# Altium PCB CH-HC-V2.3(change).PcbDoc
Units mil, origin at the board's own origin, x right, y up, seen from the top; angles counter-clockwise.
Board outline 12846.15 x 9153.85 mil, 2 copper layers (TopLayer, BottomLayer); 54 components, 528 nets, 213 pads, 1 vias.
Unrouted connection lines stored in the file: 1.
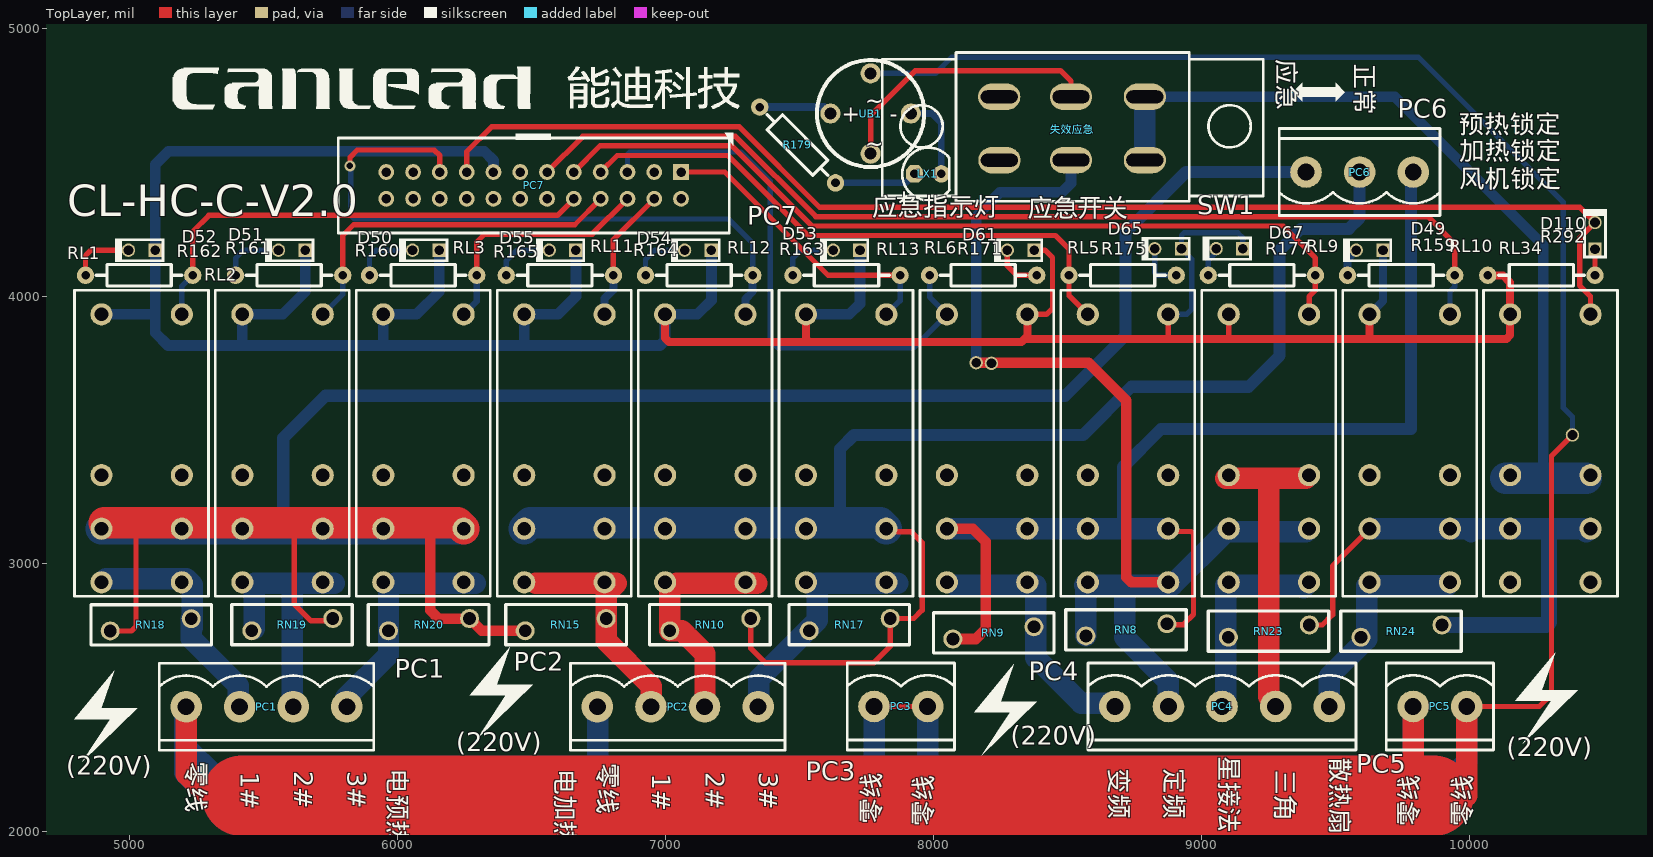
[diagram p0: TopLayer view]
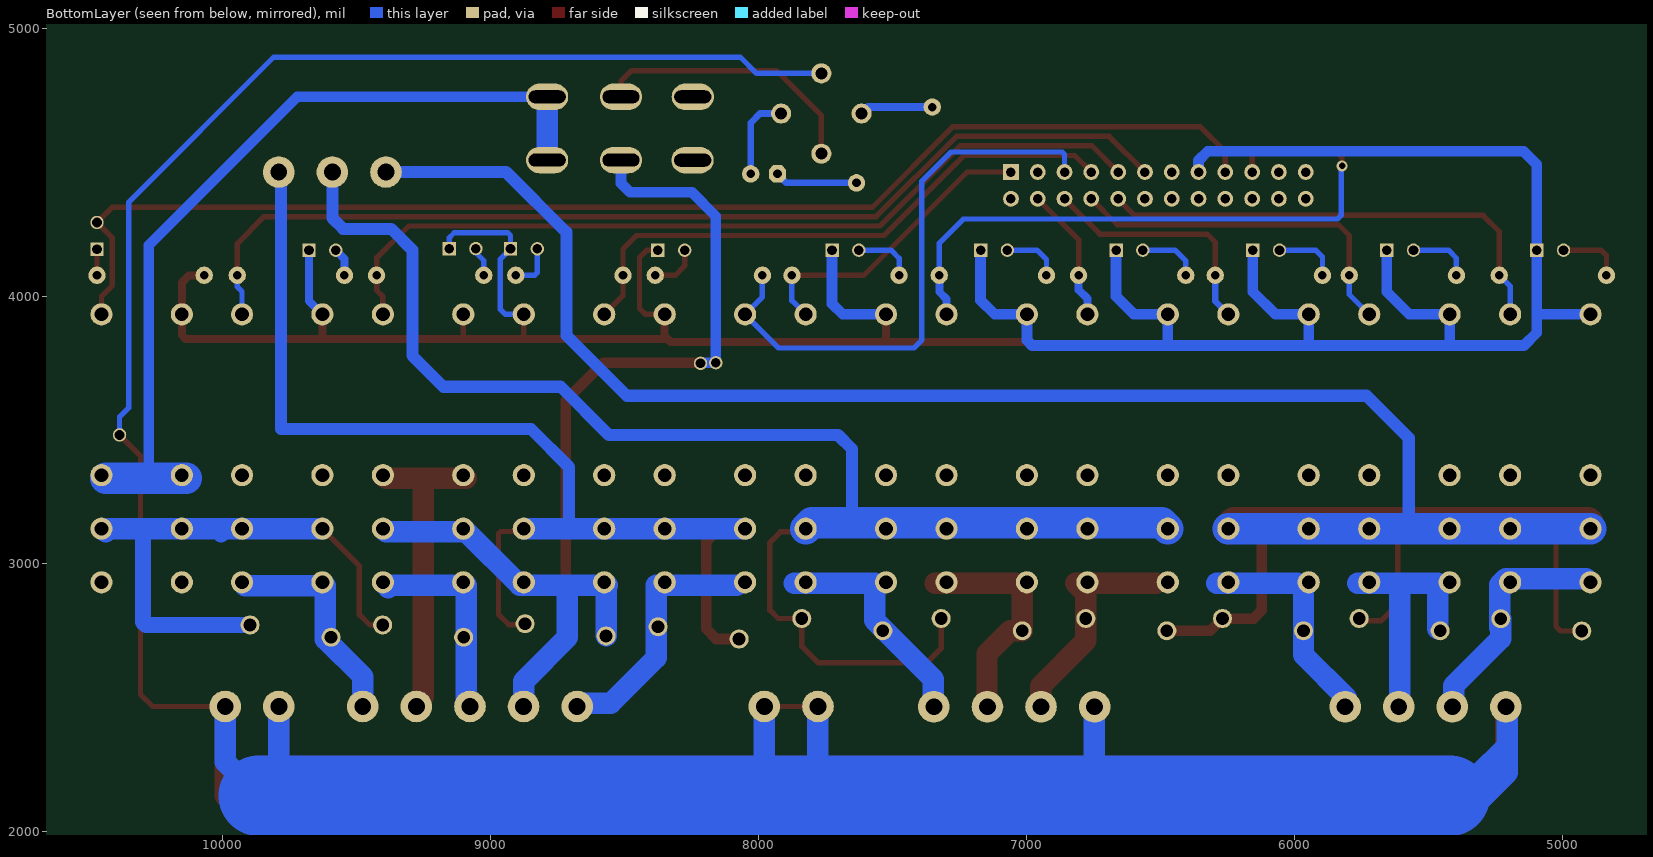
[diagram p1: BottomLayer view, seen from below]

## Layer stack, top to bottom
TopSolder: solder mask 0.4, Solder Resist, Dk 3.5
TopLayer: signal copper 1.4
Dielectric1: dielectric 12.6, FR-4, Dk 4.8
BottomLayer: signal copper 1.4
BottomSolder: solder mask 0.4, Solder Resist, Dk 3.5

## Board outline
12597.31,8763.6 -210.38,8763.6 -210.38,-390.24 12635.77,-390.24 12635.77,8340.52

## Design rules (kind name [scope] priority, off if disabled: settings)
Clearance Clearance_1 [All] p1 off: gap=30
Clearance [All] p2: gap=15
ComponentClearance [All] p1 off: gap=10 collisioncheckmode=3 verticalgap=10 showdistances=FALSE
FabricationTestPointUsage TestPointUsage [All] p1: valid=0 allowmultiple=FALSE
FabricationTestpoint Testpoint [All] p1: side=3 testpointundercomponent=TRUE minsize=40 maxsize=100 preferedsize=60 minholesize=20 maxholesize=40 preferedholesize=32 testpointgrid=1 allowsidetop=TRUE allowsidebottom=TRUE usegrid=TRUE gridtolerance=0.01
PolygonConnect PolygonConnect_1 [All vs (InPadClass('All Pads'))] p1: connectstyle=NoConnect reliefconductorwidth=10 reliefentries=4 polygonreliefangle="90 Angle" airgapwidth=10
PolygonConnect [All] p2: connectstyle=Direct reliefconductorwidth=10 reliefentries=4 polygonreliefangle="90 Angle" airgapwidth=10
RoutingVias [All] p1: holewidth=24 width=40 viastyle="Through Hole" minholewidth=24 minwidth=40 maxholewidth=24 maxwidth=40
SilkToSolderMaskClearance SilkscreenOverComponentPads [IsPad] p1: minsilkscreentomaskgap=10 clearancetoexposedcopper=TRUE
SolderMaskExpansion [All] p1: expansion=4
Width [All] p1: maxlimit=300 minlimit=10 preferedwidth=30
25 further rules are at their usual default settings.

## Classes and differential pairs
component class Lights: D74 Q11 R118 R194 RN22 Y1 Y2
component class MCU单片机: 1 24V C1 C2 C3 C4 C5 C6 C7 C8 C19 C20 C29 C30 C31 C32 C34 C35 CU1 D1 D2 D3 F F2 P P1 R1 R2 R3 R4 R5 R6 R7 R8 R9 R11 R12 R13 R35 R79 U1 VR1 ѹ? 冷/自/热 定频/变频 客户接线自动门1 情报面 星/三角 电柜内部1 电柜内部2 电柜风扇

## Components (designator, comment, footprint, x,y, rotation, side; value= is the part's Value field where it differs from the comment)
D49 "GREEN" RT_LED1 9626.56,4171.18 r0 top locked
D50 "GREEN" RT_LED1 6104.36,4171.18 r0 top locked
D51 "" RT_LED1 5604.36,4171.18 r0 top locked
D52 "GREEN" RT_LED1 5044.36,4171.18 r0 top locked
D53 "GREEN" RT_LED1 7674.36,4171.18 r0 top locked
D54 "GREEN" RT_LED1 7120,4171.18 r0 top locked
D55 "GREEN" RT_LED1 6614.36,4171.18 r0 top locked
D61 "GREEN" RT_LED1 8324.36,4171.18 r0 top locked
D65 "GREEN" RT_LED1 8874.36,4176.18 r0 top locked
D67 "GREEN" RT_LED1 9103.63,4177.1 r0 top locked
D110 "GREEN" RT_LED1 10467.74,4224.64 r270 top
LX1 "" LEDA 7928.02,4456.05 r180 top locked (schematic designator 红?)
PC1 "Header 4" PL4X 5509.49,2467.11 r0 top locked (schematic designator 再热)
PC2 "Header 4" PL4X 7044.49,2467.11 r0 top locked (schematic designator 预热)
PC3 "硬接线" PL2X 7877.01,2468.18 r180 top locked (schematic designator P24)
PC4 "硬接线" PL5X 9075.82,2468.18 r180 top locked (schematic designator 送风机)
PC5 "硬接线" PL2X 9889.21,2468.18 r180 top locked (schematic designator P24)
PC6 "Header 3" PL3X 9389.24,4462.77 r0 top locked (schematic designator 火线)
PC7 "Con2*12-1mm" FC24LX 6506.71,4412.77 r180 top (schematic designator P21)
R159 "15K" AXIAL0.4 9544.75,4077.86 r0 top locked
R160 "15K" AXIAL0.4 5894.75,4077.86 r0 top locked
R161 "15K" AXIAL0.4 5394.75,4077.86 r0 top locked
R162 "15K" AXIAL0.4 4834.75,4077.86 r0 top locked
R163 "15K" AXIAL0.4 7474.75,4077.86 r0 top locked
R164 "15K" AXIAL0.4 6924.75,4077.86 r0 top locked
R165 "15K" AXIAL0.4 6404.75,4077.86 r0 top locked
R171 "15K" AXIAL0.4 8383.84,4077.13 r180 top locked
R175 "15K" AXIAL0.4 8904.19,4077.13 r180 top locked
R177 "15K" AXIAL0.4 9024.89,4077.86 r0 top locked
R179 "51K 2512 1W" AXIAL0.4 7632.69,4422.49 r135 top locked
R292 "15K" AXIAL0.4 10068.27,4077.86 r0 top locked
RL1 "三级预热" HF115-5#1 5043.69,3431.62 r0 top locked
RL2 "二级预热" HF115-5#1 5569.57,3431.62 r0 top locked
RL3 "一级预热" HF115-5#1 6095.44,3431.62 r0 top locked
RL5 "送风机定频起停" HF115-5#1 8724.81,3431.62 r0 top locked
RL6 "送风机变频起停" HF115-5#1 8198.94,3431.62 r0 top locked
RL9 "星三角切换" HF115-5#1 9250.69,3431.62 r0 top locked
RL10 "电柜散热风扇" HF115-5#1 9776.56,3431.62 r0 top locked
RL11 "三级再热" HF115-5#1 6621.32,3431.62 r0 top locked
RL12 "二级再热" HF115-5#1 7147.19,3431.62 r0 top locked
RL13 "一级再热" HF115-5#1 7673.06,3431.62 r0 top locked
RL34 "星三角切换" HF115-5#2 10301.06,3431.62 r180 top locked
RN8 "1D471" RAD0.3 8718.99,2754.25 r0 top locked
RN9 "1D471" RAD0.3 8222.62,2742.77 r180 top locked
RN10 "1D471" RAD0.3 7166.06,2773.57 r0 top locked
RN15 "1D471" RAD0.3 6626.06,2773.57 r180 top locked
RN17 "1D471" RAD0.3 7686.06,2773.57 r0 top locked
RN18 "1D471" RAD0.3 5077.5,2772.92 r180 top locked
RN19 "1D471" RAD0.3 5606.06,2773.57 r0 top locked
RN20 "1D471" RAD0.3 6116.06,2773.57 r0 top locked
RN23 "1D471" RAD0.3 9250.75,2749.49 r0 top locked
RN24 "1D471" RAD0.3 9745.38,2749.49 r0 top locked
UB1 "DB107S" BRI-W04 7764.36,4681.18 r0 top locked (schematic designator U1X)
失效应急 "Header 6" SW220V 8515.92,4625.27 r0 top locked

## Footprints (in the part's own frame and the unit in brackets; to place one, negate y for a bottom-side part, rotate by r counter-clockwise, add the part's x,y. Pads: shape width x height; smd on the part's side, far side on the other; paste and mask are expansions set on the pad)
AXIAL0.4 [mil]
  round 65 hole 32: 1(-0.53,-0.37) 2(399.47,-0.37)
  silkscreen extent 39,-40 359,40, body extent -12,-45 412,46, height 116
BRI-W04 [mil]
  round 75 hole 45: 1(0,150) 2(0,-150) 3(-150,0) 4(150,0)
  silkscreen extent -200,-200 200,200
FC24LX [mm]
  rect 1.5x1.5 hole 0.9: 1(-13.97,-1.27)
  round 1.5 hole 0.9: 2(-13.97,1.27) 3(-11.43,-1.27) 4(-11.43,1.27) 5(-8.89,-1.27) 6(-8.89,1.27) 7(-6.35,-1.27) 8(-6.35,1.27) 9(-3.81,-1.27) 10(-3.81,1.27) 11(-1.27,-1.27) 12(-1.27,1.27) 13(1.27,-1.27) 14(1.27,1.27) 15(3.81,-1.27) 16(3.81,1.27) 17(6.35,-1.27) 18(6.35,1.27) 19(8.89,-1.27) 20(8.89,1.27) 21(11.43,-1.27) 22(11.43,1.27) 23(13.97,-1.27) 24(13.97,1.27)
  silkscreen extent -18.9,-5.01 18.54,4.5
HF115-5#1 [mm]
  round 2.1 hole 1.3: 1(-3.81,12.7) 2(3.81,12.7) 3(-3.81,-12.7) 3(3.81,-12.7) 4(-3.81,-7.62) 4(3.81,-7.62) 5(-3.81,-2.54) 5(3.81,-2.54)
  silkscreen extent -6.37,-14.01 6.33,14.99
HF115-5#2 [mm]
  round 2.1 hole 1.3: 1(-3.81,-12.7) 2(3.81,-12.7) 3(-3.81,12.7) 3(3.81,12.7) 4(-3.81,7.62) 4(3.81,7.62) 5(-3.81,2.54) 5(3.81,2.54)
  silkscreen extent -6.37,-14.99 6.33,14.01
LEDA [mil]
  oct 65x65 hole 32: A(0,0)
  round 65 hole 32: K(-100,0)
  silkscreen extent -131,-98 46,99
PL2X [mm]
  round 3 hole 1.6: 1(-2.54,0) 2(2.54,0)
  silkscreen extent -5.08,-4.13 5.08,4.13
PL3X [mm]
  round 3 hole 1.6: 1(0,0) 2(5.08,0) 3(10.16,0)
  silkscreen extent -2.54,-4.13 12.7,4.13
PL4X [mm]
  round 3 hole 1.6: 1(-7.62,0) 2(-2.54,0) 3(2.54,0) 4(7.62,0)
  silkscreen extent -10.16,-4.13 10.16,4.13
PL5X [mm]
  round 3 hole 1.6: 1(-10.16,0) 2(-5.08,0) 3(0,0) 4(5.08,0) 5(10.16,0)
  silkscreen extent -12.7,-4.13 12.7,4.13
RAD0.3 [mm]
  round 1.8 hole 1.2: 1(3.84,0.58) 2(-3.84,-0.58)
  silkscreen extent -5.76,-1.91 5.67,1.91
RT_LED1 [mil]
  rect 50x50 hole 36: A(50,0)
  round 50 hole 36: K(-50,0)
  silkscreen extent -100,-44 84,44, body extent -84,-44 84,44, height 236
SW220V [mm]
  oval 4x2.5 hole 1.2 slot 3.5 at 0 deg: 1(-6.885,-3.005) 2(-0.095,-2.995) 3(6.905,-2.995) 4(-6.905,3.005) 5(-0.095,3.005) 6(6.905,3.005)
  silkscreen extent -17.99,-6.9 18.13,7.21

## Part data
D49 D50 D51 D52 D53 D54 D55 D61 D65 D67 D110: library part LED, "Zener Diode"
PC3 PC5: library part "Header 2", "Header, 2-Pin"
R159 R160 R161 R162 R163 R164 R165 R171 R175 R177 R179 R292: library part RES2
RL1 RL2 RL3 RL5 RL6 RL10 RL11 RL12 RL13: library part RELAY
RL34: library part HF3FF
RN8 RN9 RN10 RN15 RN17 RN18 RN19 RN20 RN23 RN24: library part RN
UB1: library part Bridge
失效应急: "Header, 6-Pin"

## Free pads (board coordinates)
  round 50 hole 36: 0(8157.99,3750.99) 1(8215.15,3748.63) 2(10383.56,3481.6)

## Via types
v1: diameter 40, hole 24, TopLayer to BottomLayer, tented both sides, 1 vias

## Nets (pads, with @x,y where several pads share a name; then routed paths per layer and width w, separated by ;. In a path a pad name is that pad's centre, name@x,y a point inside that pad or via, vN(x,y) a via of type N, cw(c..) or ccw(c..) an arc to the next point about the centre after c; other vN are vias at no path point)
1C2: PC4.5 RL6.3 RN9.2 | length 936.1
  BottomLayer w80: RL6.3@8079.83,2920.34 8379.83,2920.34 8379.83,2650.68 8551.02,2479.49 PC4.5@8675.38,2479.49
1C3: pad.0 pad.1 PC4.4 RL5.3 RL9.4 RN8.2 失效应急.2 | length 4165.1
  TopLayer w40: pad.0 8577.72,3750.98 8718.68,3610.02 8718.68,2950.65 8737.71,2931.62 RL5.3@8874.81,2931.62
  BottomLayer w39.37: pad.1 8212.79,3750.99 pad.0 8157.98,4298.12 8247.21,4387.35 8478.35,4387.35 8512.18,4421.18 失效应急.2
  BottomLayer w80: RL5.3@8563.52,2920.44 RL5.3@8565.38,2918.58 ; RN8.2 8567.81,2916.15 RL5.3@8565.38,2918.58 ; PC4.4@8875.38,2479.49 8875.38,2562.72 8712.28,2725.81 8712.28,2910.82 8721.9,2920.44 ; RL9.4@9099.99,3131.2 RL9.4@9089.24,3120.44 ; RL9.4@9389.24,3120.44 RL9.4@9089.24,3120.44 ; RL5.3@8565.38,2918.58 8567.24,2920.44 8721.9,2920.44 ; 8721.9,2920.44 8889.24,2920.44 RL9.4@9089.24,3120.44
1C6: 
1C7: PC1.4 RL3.3 RN20.2 | length 803.9
  BottomLayer w80: PC1.4@5804.87,2500.43 5964.88,2660.44 RN20.2 5964.88,2904.2 5988.85,2928.17 6288.85,2928.17
1C8: PC1.3 RL2.3 RN19.2 | length 896.8
  BottomLayer w80: RN19.2@5463.22,2759.08 5463.22,2928.17 5604.87,2928.17 ; PC1.3@5604.87,2500.43 5604.87,2928.17 ; 5763.22,2928.17 5604.87,2928.17
1C9: PC1.2 RL1.3 RN18.2 | length 865.7
  BottomLayer w80: RL1.3@4910.57,2944.96 5210.57,2944.96 5232.61,2922.91 5232.61,2790.56 5232.61,2762.29 5228.68,2758.36 ; RN18.2 5228.68,2758.36 ; PC1.2@5404.87,2500.43 5404.87,2545.43 5228.68,2721.63 5228.68,2758.36
1C10: PC2.4 RL13.3 RN17.2 | length 845.6
  BottomLayer w80: PC2.4@7346.06,2473.57 7346.06,2569.97 7565.75,2789.66 7565.75,2928.17 7865.75,2928.17
1C11: PC2.3 RL12.3 RN10.2 | length 850.6
  TopLayer w80: PC2.3@7146.06,2468.88 7146.06,2664.85 7060.17,2750.74 RN10.2 7014.88,2902.93 7040.11,2928.17 7340.11,2928.17
1C12: PC2.2 RL11.3 RN15.2 | length 844.6
  TopLayer w80: 6514.48,2928.17 6673.41,2928.17 6814.48,2928.17 6777.24,2890.93 RN15.2 6777.24,2713.06 6946.06,2544.24 PC2.2@6946.06,2468.88
1C17: PC4.1 RL10.3 RN24.2 | length 798
  BottomLayer w80: PC4.1@9475.38,2479.49 9475.38,2579.79 9615.38,2719.79 9615.38,2919.49 RL10.3@9915.38,2919.49
1C22: 
1C27: 
1C31: 
1C32: 
1C33: 
1C34: 
1C35: 
1C36: 
1C37: 
2-38: 
2-39: 
2-40: 
2-41: 
3-24: 
3-25: 
3-26: 
3-27: 
3-28: 
3-69: 
3-70: 
3-71: 
3-72: 
10V-面板-温度输入: 
10V-面板-湿度输入: 
24V: D49.A D50.A D51.A D52.A D53.A D54.A D55.A D61.A D65.A D67.A PC7.15 R292.1 RL1.1 RL2.1 RL3.1 RL5.2 RL6.2 RL9.1 RL10.1 RL11.1 RL12.1 RL13.1 RL34.2 | length 11899.9
  TopLayer w20: RL6.2 8420.84,3931.62 8443.03,3953.81 8443.03,4143.29 8415.14,4171.18 D61.A ; 8872.17,3839.86 8874.81,3842.51 RL5.2 ; RL9.1 9100.69,3841.57 9102.4,3839.86
  TopLayer w30: RL12.1 6997.19,3843.62 7012.3,3828.51 7535.41,3828.51 ; RL13.1 7523.06,3840.86 7535.41,3828.51 ; RL6.2 8348.94,3850.32 8338.48,3839.86 ; RL10.1 9626.56,3841.69 9624.73,3839.86 ; R292.1 10124.38,4077.49 10151.06,4050.81 RL34.2 10151.06,3853.66 10137.27,3839.86 9624.73,3839.86 ; 7535.41,3828.51 8327.13,3828.51 8338.48,3839.86 ; 8338.48,3839.86 8872.17,3839.86 9102.4,3839.86 9624.73,3839.86
  BottomLayer w20: RL5.2 8943.96,3931.62 8963.4,3951.06 8963.4,4137.15 D65.A 8924.36,4226.18 8934.36,4236.18 9134.36,4236.18 9153.63,4216.91 D67.A
  BottomLayer w30: RL10.1 9676.56,3981.62 D49.A
  BottomLayer w40: RL1.1 5093.92,3931.62 5094.36,3931.18 ; D51.A 5654.36,4016.18 5569.8,3931.62 RL2.1 5419.57,3819.68 5415.44,3815.55 ; D50.A 6154.36,4016.18 6069.8,3931.62 RL3.1 5945.44,3816.09 5944.91,3815.55 ; PC7.15 6356.71,4506.07 6322.25,4540.53 5143.71,4540.53 5094.36,4491.18 D52.A 5094.36,3931.18 ; D55.A 6664.36,3998.84 6597.15,3931.62 RL11.1 6471.32,3821.32 6477.08,3815.55 ; D54.A 7170,3984.48 7117.15,3931.62 RL12.1 6997.19,3834.64 6978.1,3815.55 6477.08,3815.55 ; RL13.1 7684.8,3931.62 7724.36,3971.18 D53.A ; 5094.36,3931.18 5094.36,3863.11 5141.92,3815.55 5415.44,3815.55 ; 5415.44,3815.55 5944.91,3815.55 ; 5944.91,3815.55 6477.08,3815.55
24V+: 
24V-情报-负压: 
24V-情报-远值: 
24V-情报-远启: 
24V-面板-值机: 
24V-面板-故障: 
24V-面板-滤网: 
24V-面板-运行: 
24VIN: 
24VIN2: 
164CLK: 
164SDA: 
165S_DO1: 
165S_DO2: 
165S_DO3: 
165S_DO4: 
220V_N: pad.2 PC1.1 PC2.1 PC3.1 PC3.2 PC5.1 PC5.2 UB1.1 | length 17295.6
  TopLayer w20: PC3.2 PC3.1 ; PC5.1 10259.74,2468.18 10305.24,2513.68 10305.24,3403.28 pad.2
  TopLayer w80: PC1.1 5209.49,2215.82 5289.54,2135.77 5418.84,2135.77 ; 9789.21,2146.65 PC5.2 ; 9989.21,2135.43 PC5.1
  TopLayer w300: 5418.84,2135.77 5419.17,2135.43 9863.73,2135.43
  BottomLayer w20: UB1.1 8006.55,4831.18 8066.54,4891.17 9808.83,4891.17 10349.1,4350.9 10349.1,3583.4 10383.55,3548.94 pad.2
  BottomLayer w80: PC1.1@5204.87,2460.43 5204.87,2320.43 ; 5329.81,2095.49 5204.87,2220.43 5204.87,2320.43 ; 5379.87,2205.43 5319.87,2205.43 5204.87,2320.43 ; 6746.06,2237.23 PC2.1@6746.06,2459.49 ; 7777.01,2245.38 PC3.2 ; 7977.01,2257.98 PC3.1 ; 9789.21,2141.73 PC5.2 ; 9863.73,2135.43 9989.21,2260.91 PC5.1
  BottomLayer w300: 5419.17,2135.43 9863.73,2135.43
485-A: 
485-B: 
485_GND_1: 
485_GND_2: 
485_GND_3: 
485_VCC_1: 
485_VCC_2: 
485_VCC_3: 
+10V: 
+15V: 
<-变频故障: 
<-变频运行: 
<-工频故障: 
<-工频运行: 
<-急停按钮: 
<-本地值机: 
<-本地运行: 
<-远值使能: 
<-远起使能: 
AC24GATE1: 
AC24GATE2: 
AC24V1: 
AC24V2: 
AD1: 
AD2: 
AD3: 
AD4: 
AD5: 
AD6: 
CLK_165: 
C变频: 
C情报输出: 
DA_ADD1: 
DA_ADD2: 
DA_WR1: 
DA_WR2: 
DB0: 
DB1: 
DB2: 
DB3: 
DB4: 
DB5: 
DB6: 
DB7: 
DE/RE: 
DE/RE2: 
DI1: 
DI2: 
DI3: 
DI4: 
DI5: 
DI6: 
DI7: 
DI8: 
DI9: 
DI10: 
DI11: 
DI12: 
DI13: 
DI14: 
DI15: 
DI15A: 
DI16: 
DI17: 
DI18: 
DI19: 
DI20: 
DI21: 
DI22: 
DI23: 
DI24: 
DI25: 
DI26: 
DI27: 
DI28: 
DI29: 
DI30: 
DI31: 
DI32: 
DI33: 
DI34: 
DI35: 
DI36: 
DI37: 
DI38: 
DI39: 
DI40: 
EX_A1: 
EX_B1: 
GND: D110.K PC7.17 RL34.1 | length 4856.6
  TopLayer w20: PC7.17 6256.71,4538.53 6349.36,4631.18 7274.36,4631.18 7574.36,4331.18 10411.19,4331.18 D110.K 10410.25,4217.15 10410.25,4039.53 10451.06,3998.72 RL34.1
IN2-A+: 
IN2-B-: 
IN-A+: 
IN-B-: 
L: 
LAMP1: 
LAMP2: 
LAMP3: 
LAMP4: 
LAMP5: 
LAMP6: 
LAMP7: 
LAMP8: 
LAMP9: 
LAMP10: 
LAMP11: 
LAMP12: 
LAMP13: 
LAMP14: 
LOUT1: 
LOUT2: 
LOUT3: 
LOUT4: 
LOUT5: 
LOUT6: 
LOUT7: 
LOUT8: 
LOUT9: 
LOUT10: 
LOUT11: 
LOUT12: 
LOUT13: 
LOUT14: 
L加热: PC6.2 RL11.4 RL12.4 RL13.4 RN10.1 RN17.1 | length 5618.9
  TopLayer w20: RN10.1 7317.24,2684.96 7370.31,2631.89 7776.8,2631.89 7837.24,2692.33 RN17.1 7925.25,2796.41 7956.74,2827.9 7956.74,3080.42 7917.21,3119.95 7866.06,3119.95
  BottomLayer w45: 7650.52,3154.53 7650.52,3429.9 7702.22,3481.59 8557.36,3481.59 8737.19,3661.42 9175,3661.42 9291,3777.42 9291,4172 9370,4251 9549,4251 9589.24,4291.24 PC6.2
  BottomLayer w118.11: RL11.4@6471.32,3131.62 6494.22,3154.53 7650.52,3154.53 7800.16,3154.53 RL13.4@7823.06,3131.62
L变频: PC6.3 RL5.4 RL6.4 RL10.4 RL34.4 RN8.1 RN9.1 RN23.1 RN24.1 | length 6318.4
  TopLayer w20: RL5.4@8869.8,3121.39 8960.77,3121.39 8969.12,3113.05 8969.12,2811.92 8930.46,2773.27 RN8.1@8882.49,2773.27 ; RN23.1 9449.9,2772.32 9488.55,2810.97 9488.55,2992.66 RL10.4@9615.38,3119.49
  TopLayer w39.37: RL6.4@8048.94,3131.62 8146.16,3131.62 8194.13,3083.66 8194.13,2757.87 8156.19,2719.93 RN9.1
  BottomLayer w45: 8706.45,3131.62 8706.45,3361.73 8847.67,3502.95 9780.74,3502.95 9780.74,4454.27 PC6.3
  BottomLayer w60: RN24.1 10285.19,2772.32 10296.27,2783.4 10296.27,3119.49 ; 9995.3,3119.49 10004.87,3109.91
  BottomLayer w80: RL6.4@8048.94,3131.62 8348.94,3131.62 8574.81,3131.62 8706.45,3131.62 RL5.4@8874.81,3131.62 ; RL10.4@9626.56,3131.62 9926.56,3131.62 10151.06,3131.62 10423.68,3131.62 RL34.4@10434.87,3120.43
L预热: PC6.1 RL1.4 RL2.4 RL3.4 RN15.1 RN18.1 RN19.1 RN20.1 | length 9341.4
  TopLayer w20: RL1.4@4922.97,3138.64 5013.94,3138.64 5022.28,3130.3 5022.28,2767.29 5005.07,2750.09 RN18.1 ; RL2.4@5750.82,3121.85 5612.83,3121.85 5612.83,2851.06 5676.34,2787.54 RN19.1@5756.57,2787.54
  TopLayer w39.37: 6120.28,3154.53 6120.28,2826.95 6150.82,2796.41 RN20.1 6312.91,2750.74 RN15.1
  TopLayer w118.11: RL1.4@4903.77,3154.53 6120.28,3154.53 6222.54,3154.53 RL3.4@6245.44,3131.62
  BottomLayer w45: 5572.08,3147.64 5572.08,3470.47 5729.56,3627.95 8490.39,3627.95 8714.8,3852.36 8714.8,4238.25 8716.52,4238.25 8941.04,4462.77 PC6.1
  BottomLayer w118.11: RL1.4@4893.69,3131.62 5193.69,3131.62 5419.57,3131.62 5719.57,3131.62 5945.44,3131.62 RL3.4@6245.44,3131.62
NetC1_1: 
NetC14_1: 
NetC43_2: 
NetC44_2: 
NetD1_A: 
NetD6_A: 
NetD7_A: 
NetD8_A: 
NetD9_A: 
NetD10_A: 
NetD11_A: 
NetD12_A: 
NetD13_A: 
NetD14_A: 
NetD15_A: 
NetD15_K: 
NetD16_A: 
NetD16_K: 
NetD17_A: 
NetD17_K: 
NetD18_A: 
NetD18_K: 
NetD19_A: 
NetD20_A: 
NetD21_A: 
NetD22_A: 
NetD23_A: 
NetD24_A: 
NetD25_A: 
NetD26_A: 
NetD27_A: 
NetD28_A: 
NetD29_A: 
NetD30_A: 
NetD31_A: 
NetD32_A: 
NetD33_A: 
NetD34_A: 
NetD35_K: 
NetD36_K: 
NetD37_K: 
NetD38_K: 
NetD39_K: 
NetD40_K: 
NetD41_K: 
NetD42_K: 
NetD43_K: 
NetD44_K: 
NetD45_K: 
NetD46_K: 
NetD47_K: 
NetD48_K: 
NetD49_K: D49.K R159.1 | length 107.1
  BottomLayer w30: R159.1 9544.22,4138.84 D49.K
NetD50_K: D50.K R160.1 | length 239.1
  BottomLayer w20: R160.1 5894.22,4146.04 5919.36,4171.18 D50.K
NetD51_K: D51.K R161.1 | length 236.2
  BottomLayer w20: R161.1 5394.22,4141.04 5424.36,4171.18 D51.K
NetD52_K: D52.K R162.1 | length 242
  TopLayer w20: R162.1 4834.22,4151.04 4854.36,4171.18 D52.K
NetD53_K: D53.K R163.1 | length 226.2
  BottomLayer w20: R163.1 7474.22,4141.04 7504.36,4171.18 D53.K
NetD54_K: D54.K R164.1 | length 218.9
  BottomLayer w20: R164.1 6924.22,4136.04 6959.36,4171.18 D54.K
NetD55_K: D55.K R165.1 | length 230.3
  BottomLayer w20: R165.1 6404.22,4131.04 6444.36,4171.18 D55.K
NetD56_K: 
NetD57_K: 
NetD58_K: 
NetD59_K: 
NetD60_K: 
NetD61_K: D61.K R171.1 | length 183.5
  TopLayer w20: D61.K 8274.36,4111.98 8308.85,4077.49 R171.1
NetD62_K: 
NetD63_K: 
NetD64_K: 
NetD65_K: D65.K R175.1 | length 173
  BottomLayer w20: D65.K 8824.36,4087.82 8834.68,4077.49 R175.1
NetD66_K: 
NetD67_K: D67.K R177.1 | length 111.7
  BottomLayer w20: R177.1 9024.36,4132.22 9053.63,4161.49 D67.K
NetD71_A: 
NetD72_K: 
NetD73_K: 
NetD74_A: 
NetD74_K: 
NetD75_A: 
NetD75_K: 
NetD76_K: 
NetD77_K: 
NetD78_K: 
NetD79_K: 
NetD80_K: 
NetD81_K: 
NetD82_K: 
NetD83_K: 
NetD84_K: 
NetD85_K: 
NetD86_K: 
NetD87_K: 
NetD88_K: 
NetD89_K: 
NetD90_K: 
NetD91_K: 
NetD92_K: 
NetD93_K: 
NetD94_K: 
NetD95_A: 
NetD96_A: 
NetD97_A: 
NetD98_A: 
NetD99_A: 
NetD100_A: 
NetD101_A: 
NetD102_A: 
NetD103_A: 
NetD104_A: 
NetD105_A: 
NetD106_A: 
NetD106_K: 
NetD107_A: 
NetD107_K: 
NetD108_A: 
NetD108_K: 
NetD109_A: 
NetD110_A: D110.A R292.2 | length 97.1
  TopLayer w20: R292.2 D110.A
NetD199_A: 
NetDZ1_K: 
NetF1_1: 
NetF2_1: 
NetF3_1: 
NetF4_1: 
NetF5_1: 
NetF6_1: 
NetF9_2: 
NetQ1_1: 
NetQ1_2: 
NetQ2_2: 
NetQ3_2: 
NetQ4_1: 
NetQ4_2: 
NetQ5_1: 
NetQ5_2: 
NetQ6_2: 
NetQ7_1: 
NetQ7_2: 
NetQ8_2: 
NetQ9_1: 
NetQ9_2: 
NetQ10_2: 
NetQ11_2: 
NetQ12_2: 
NetQ13_1: 
NetQ13_2: 
NetQ13_3: 
NetQ14_1: 
NetQ15_2: 
NetQ15_3: 
NetQ16_2: 
NetQ17_2: 
NetQ18_1: 
NetQ18_2: 
NetQ18_3: 
NetQ19_1: 
NetQ19_2: 
NetQ20_2: 
NetQ21_2: 
NetQ22_2: 
NetQ23_2: 
NetQ24_2: 
NetQ25_2: 
NetR15_2: 
NetR16_2: 
NetR17_2: 
NetR18_2: 
NetR19_2: 
NetR20_2: 
NetR21_2: 
NetR22_2: 
NetR23_2: 
NetR24_2: 
NetR25_2: 
NetR26_2: 
NetR27_2: 
NetR28_2: 
NetR29_2: 
NetR30_2: 
NetR31_2: 
NetR32_2: 
NetR33_2: 
NetR34_2: 
NetR36_1: 
NetR68_2: 
NetR69_2: 
NetR70_2: 
NetR71_2: 
NetR88_1: 
NetR89_1: 
NetR91_2: 
NetR92_1: 
NetR93_2: 
NetR94_2: 
NetR95_2: 
NetR96_2: 
NetR97_2: 
NetR98_2: 
NetR178_2: 
NetR179_1: LX1.A R179.1 | length 308.6
  BottomLayer w25: R179.1 7894.34,4422.38 LX1.A
NetR179_2: R179.2 UB1.3 | length 273.8
  BottomLayer w30: R179.2 7590.32,4705.22 UB1.3
NetR192_1: 
NetR196_2: 
NetR197_1: 
NetR199_1: 
NetR200_2: 
NetR201_2: 
NetR204_1: 
NetR209_1: 
NetR211_2: 
NetR212_1: 
NetR213_2: 
NetR293_1: 
NetR294_1: 
NetRL34_5: RL34.5 失效应急.3 失效应急.6 | length 3061.8
  BottomLayer w39.37: 失效应急.6 9720.93,4743.57 10274.36,4190.14 10274.36,3380.43
  BottomLayer w80: 失效应急.3 失效应急.6
  BottomLayer w118.11: RL34.5@10134.87,3320.43 RL34.5@10434.87,3320.43
NetU1X_2: UB1.2 失效应急.5 | length 1034.6
  TopLayer w20: UB1.2 7764.36,4674.26 7931.29,4841.18 8472.82,4841.18 8512.18,4801.82 失效应急.5
NetU1X_4: LX1.K UB1.4 | length 318.5
  BottomLayer w25: UB1.4 7993.33,4681.18 8028.02,4646.49 LX1.K
NetU42_2: 
NetU55_2: 
OSC1: 
OSC2: 
OSC3: 
OSC4: 
OUT1: 
OUT2: 
OUT3: 
OUT4: 
OUT5: 
OUT6: 
OUT7: 
OUT8: 
OUT9: 
OUT10: 
OUT11: 
OUT12: 
OUT13: 
OUT14: 
OUT15: 
OUT15X: 
OUT16: 
OUT17: 
OUT18: 
OUT19: 
OUT20: 
OUT21: 
OUT22: 
OUT23: 
OUT24: 
OUT25: 
OUT26: 
OUT27: 
OUT28: 
OUT29: 
OUT30: 
OUT31: 
OUT32: 
PLD_165: 
POL_A2: 
POL_B2: 
RESET1: 
RESET2: 
ROUT1: PC7.2
ROUT2: PC7.1 R163.2 RL13.2 | length 1144.2
  TopLayer w20: PC7.1 7219.79,4462.77 7605.06,4077.49 R163.2
  BottomLayer w20: RL13.2 7874.22,3982.78 R163.2
ROUT3: PC7.6 R160.2 RL3.2 | length 919.3
  TopLayer w20: R160.2 6294.22,4201.34 6324.06,4231.18 6725.12,4231.18 PC7.6
  BottomLayer w25: RL3.2 6294.22,3980.4 R160.2
ROUT4: PC7.8 R161.2 RL2.2 | length 1344.5
  TopLayer w20: R161.2 5794.22,4226.04 5834.36,4266.18 6660.12,4266.18 PC7.8
  BottomLayer w20: RL2.2 5794.22,4006.28 R161.2
ROUT5: PC7.10 R162.2 RL1.2 | length 1799.1
  TopLayer w20: R162.2 5234.22,4241.04 5294.36,4301.18 6595.12,4301.18 PC7.10
  BottomLayer w20: RL1.2 5193.69,4036.97 R162.2
ROUT6: PC7.12
ROUT7: PC7.14
ROUT8: PC7.16
ROUT9: PC7.18
ROUT10: PC7.20
ROUT11: PC7.22
ROUT12: PC7.24
ROUT13: PC7.23
ROUT14: PC7.21
ROUT15: 
ROUT15X: 
ROUT16: 
ROUT17: 
ROUT18: 
ROUT19: 
ROUT20: 
ROUT21: 
ROUT22: PC7.13
ROUT23: PC7.11 R159.2 RL10.2 | length 3880.4
  TopLayer w20: PC7.11 6690.12,4596.18 7259.86,4596.18 7559.86,4296.18 9844.36,4296.18 9944.22,4196.32 R159.2
  BottomLayer w20: RL10.2 9926.56,4016.18 9944.22,4033.84 R159.2
ROUT24: PC7.9 R177.2 RL9.2 | length 3201.8
  TopLayer w20: PC7.9 6755.12,4561.18 7245.37,4561.18 7545.37,4261.18 9304.36,4261.18 9424.36,4141.18 R177.2 9424.36,4021.72 9400.69,3998.04 RL9.2
ROUT25: PC7.7 R175.2 RL5.1 | length 2191.5
  TopLayer w20: PC7.7 6818.7,4524.76 7232.29,4524.76 7530.87,4226.18 8454.36,4226.18 8504.72,4175.83 R175.2 8504.72,4001.72 RL5.1
ROUT26: PC7.5 R171.2 RL6.1 | length 2136.3
  BottomLayer w20: PC7.5 6856.71,4528.53 6865.68,4537.49 7280.55,4537.49 7389.36,4428.69 7389.36,3836.18 7419.36,3806.18 7923.5,3806.18 RL6.1 7984.36,3996.2 R171.2
ROUT27: PC7.3
ROUT28: PC7.4 R165.2 RL11.2 | length 507.9
  TopLayer w20: R165.2 6804.22,4210.28 PC7.4
  BottomLayer w30: RL11.2 6771.32,3990.49 6804.22,4023.4 R165.2
ROUT29: PC7.19 R164.2 RL12.2 | length 2464.8
  TopLayer w20: v1(5820.95,4485.53) 5820.95,4517.55 5848.37,4544.98 6135.45,4544.98 6156.71,4523.72 PC7.19
  BottomLayer w20: v1(5820.95,4485.53) 5820.95,4487.92 5823.56,4490.53 5823.56,4301.98 5837.78,4287.77 7072.78,4287.77 7234.41,4287.77 7324.22,4197.95 R164.2
  BottomLayer w30: RL12.2 7297.19,3989.01 7324.22,4016.04 R164.2
ROUT30: 
ROUT31: 
ROUT32: 
RX: 
RX2: 
RX3: 
SDO_165: 
TX: 
TX2: 
TX3: 
VCC: 
VPP1: 
VPP2: 
三角接法: PC4.2 RL9.5 | length 1151.2
  TopLayer w80: RL9.5@9089.24,3320.44 9250.75,3320.44 ; PC4.2@9275.38,2479.49 9250.75,2504.12 9250.75,3320.44 ; RL9.5@9389.24,3320.44 9250.75,3320.44
中效: 
亚高效: 
冷/热水: 
冷水阀执行: 
初效: 
加湿器控制: 
变频值机: 
变频全速: 
变频开启: 
回风压差: 
回风温度: 
回风湿度: 
备用AO1: 
备用AO2: 
备用AO3: 
外急停开关: 
大地: 
定量关: 
定量开: 
密闭关: 
密闭开: 
手动调速: 
星接法: PC4.3 RL9.3 RN23.2 | length 759.5
  BottomLayer w80: PC4.3@9075.38,2479.49 9089.24,2493.34 9089.24,2920.44 9389.24,2920.44 RL9.3@9380.17,2911.38
消防: 
热水阀执行: 
电高温: 
硬接线-温度: 
硬接线-湿度: 
管温: 
缺风: 
自动门开关1: 
自动门开关2: 
自动门开关3: 
自动门开关4: 
自动门开关5: 
自动门开关6: 
设定温度: 
设定湿度: 
负压: 
远值机: 
远启动: 
防冻: 
预热温感: 
预高温: 
频率控制: 
频率选择输出: 
高效: 
pads on no net: RL1.5 RL2.5 RL3.5 RL5.5 RL6.5 RL10.5 RL11.5 RL12.5 RL13.5 RL34.3 失效应急.1 失效应急.4

## Silkscreen, mask and mechanical layers (free items; w line width, h text height)
TopOverlay:
  drawing of 1659 lines, arcs and shapes, not listed
  text "应急" at 9260.14,4884.54 h118.11 r270
  text "正常" at 9551.48,4866.82 h118.11 r270
  text "PC6" at 9732,4642 h118.11
  text "预热锁定" at 9960,4584 h118.11
  text "加热锁定" at 9961,4484 h118.11
  text "风机锁定" at 9961,4380 h118.11
  text "SW1" at 8983,4281 h118.11
  text "应急指示灯" at 7771.13,4275.66 h118.11
  text "应急" at 8351,4272 h118.11
  text "开关" at 8535,4271 h118.11
  text "CL-HC-C-V2.0" at 4765.47,4258.35 h200
  text "PC7" at 7304.44,4242.11 h118.11
  text "PC2" at 6433.27,2578.04 h118.11
  text "PC1" at 5987.46,2550.68 h118.11
  text "PC4" at 8355.24,2542.68 h118.11
  text "(220V)" at 8287.55,2301.81 h118.11
  text "星接法" at 9044.49,2282.11 h118.11 r270
  text "(220V)" at 6217.21,2277.2 h118.11
  text "散热扇" at 9459.49,2277.11 h118.11 r270
  text "零线" at 5189.49,2262.11 h118.11 r270
  text "(220V)" at 10139.09,2258.05 h118.11
  text "零线" at 6724.49,2257.11 h118.11 r270
  text "变频" at 8634.49,2237.11 h118.11 r270
  text "定频" at 8839.49,2237.11 h118.11 r270
  text "电预热" at 5941.17,2234.21 h118.11 r270
  text "电加热" at 6567.16,2232.24 h118.11 r270
  text "三角" at 9254.49,2232.11 h118.11 r270
  text "2#" at 5589.49,2227.11 h118.11 r270
  text "3#" at 5789.49,2227.11 h118.11 r270
  text "1#" at 5389.49,2222.11 h118.11 r270
  text "2#" at 7124.49,2222.11 h118.11 r270
  text "3#" at 7324.49,2222.11 h118.11 r270
  text "1#" at 6924.49,2217.11 h118.11 r270
  text "PC5" at 9577.07,2196.52 h118.11
  text "(220V)" at 4762.22,2189.68 h118.11
  text "PC3" at 7521.77,2167.8 h118.11
  text "零线" at 7824.13,2031 h118.11 r90
  text "零线" at 8018.66,2021.16 h118.11 r90
  text "零线" at 9830.87,2021.16 h118.11 r90
  text "零线" at 10030.87,2021.16 h118.11 r90
BottomSolder:
  lines w10: 9175,3661.42 9178.23,3664.65
  lines w25: 4893.69,3131.62 4893.69,3154.53 6247.9,3154.53 ; 5203.97,2343.5 5203.97,2238.24 5407.76,2034.45 9991.02,2034.45 9991.02,2468.18 ; 5204.45,2444.92 5204.45,2313.14 5307.94,2209.65 9979.6,2209.65 ; 5319.86,2123.03 9978.57,2123.03 ; 5577.38,3162.74 5580.18,3165.54 5580.18,3487.98 5723.2,3631 8499.11,3631 8515.92,3647.82 8715.02,3846.91 8715.02,4236.74 8941.04,4462.77 9389.24,4462.77 ; 6471.32,3131.62 7823.06,3131.62 ; 6746.29,2035.43 6746.29,2467.11 ; 7647.72,3137.14 7647.72,3435.05 7700.67,3488 8563.24,3488 8739.89,3664.65 9178.23,3664.65 ; 7778.81,2037.4 7778.81,2468.18 ; 7978.81,2037.4 7978.81,2468.18 ; 8088.51,3125.98 8635.58,3125.98 ; 8566.37,3122.95 8854.17,3122.95 ; 8706.45,3124.02 8706.45,3361.73 8844.71,3500 9779.28,3500 ; 9115,3664.65 9178.23,3664.65 ; 9589.24,4462.77 9589.24,4291.24 9549,4251 9370,4251 9291,4172 9291,3777.42 ; 9626.56,3131.62 10451.06,3131.62 ; 9779.28,3135.43 9779.28,3685.43 ; 9779.28,3560 9779.28,4393.56 ; 9791.02,2037.4 9791.02,2468.18 ; 9178.23,3664.65 9291,3777.42 ; 9178.23,3664.65 9291,3777.42
Mechanical1:
  circle w10: c10322.08,2002.91 r66.93
  circle w10: c10400.82,4680.08 r66.93
  circle w10: c4967.75,4680.08 r66.93
  circle w10: c4967.75,2002.91 r66.93
  lines w10: 4731.53,1983.23 ccw(c4869.32,1983.23) 4869.32,1845.43 ; 4731.53,4778.5 cw(c4869.32,4778.5) 4869.32,4916.3 ; 10420.5,1845.43 ccw(c10420.5,1983.23) 10558.3,1983.23 ; 10420.5,4916.3 cw(c10420.5,4778.5) 10558.3,4778.5 ; 10558.3,1845.43 10558.3,4916.3 ; 10558.3,1845.43 4731.53,1845.43 4731.53,4916.3 10558.3,4916.3 ; 10558.3,1845.43 10558.3,4916.3
  text "PCB名称: CL-HC-C-V2.0" at 4856.83,6271.9 h120
  text "尺寸： 14.8CM*7.8CM" at 4856.94,6133.99 h120
  text "板材：  FR4" at 4856.94,5995.06 h120
  text "板子层数：  2" at 4856.94,5856.93 h120
  text "板子厚度：  1.6" at 4856.94,5717.76 h120
  text "阻焊颜色：  蓝色" at 4856.83,5579.52 h120
  text "铜箔厚度：  h/hoz" at 4856.83,5440.35 h120
  text "阻焊覆盖：  过孔盖油" at 4856.83,5301.54 h120
  text "字符颜色：  白色" at 4856.94,5163.4 h120
  text "焊盘喷镀：  有铅喷锡" at 4856.94,5024.35 h120
DrillDrawing:
  text ".Legend" at 10823,1861 h120

## Text inside footprints (layer, text, board x,y; h text height)
LX1: TopOverlay "+" at 7863,4397.73 h60 r270
UB1: TopOverlay "~" at 7744.36,4541.18 h60; TopOverlay "+" at 7655.86,4651.29 h60; TopOverlay "-" at 7835.92,4650.81 h60; TopOverlay "~" at 7744.36,4701.18 h60